# EAGLE board SparkFun-ESP8266-WiFi-Shield-Panel-v10 (EAGLE 7.2.0), part 1 of 3
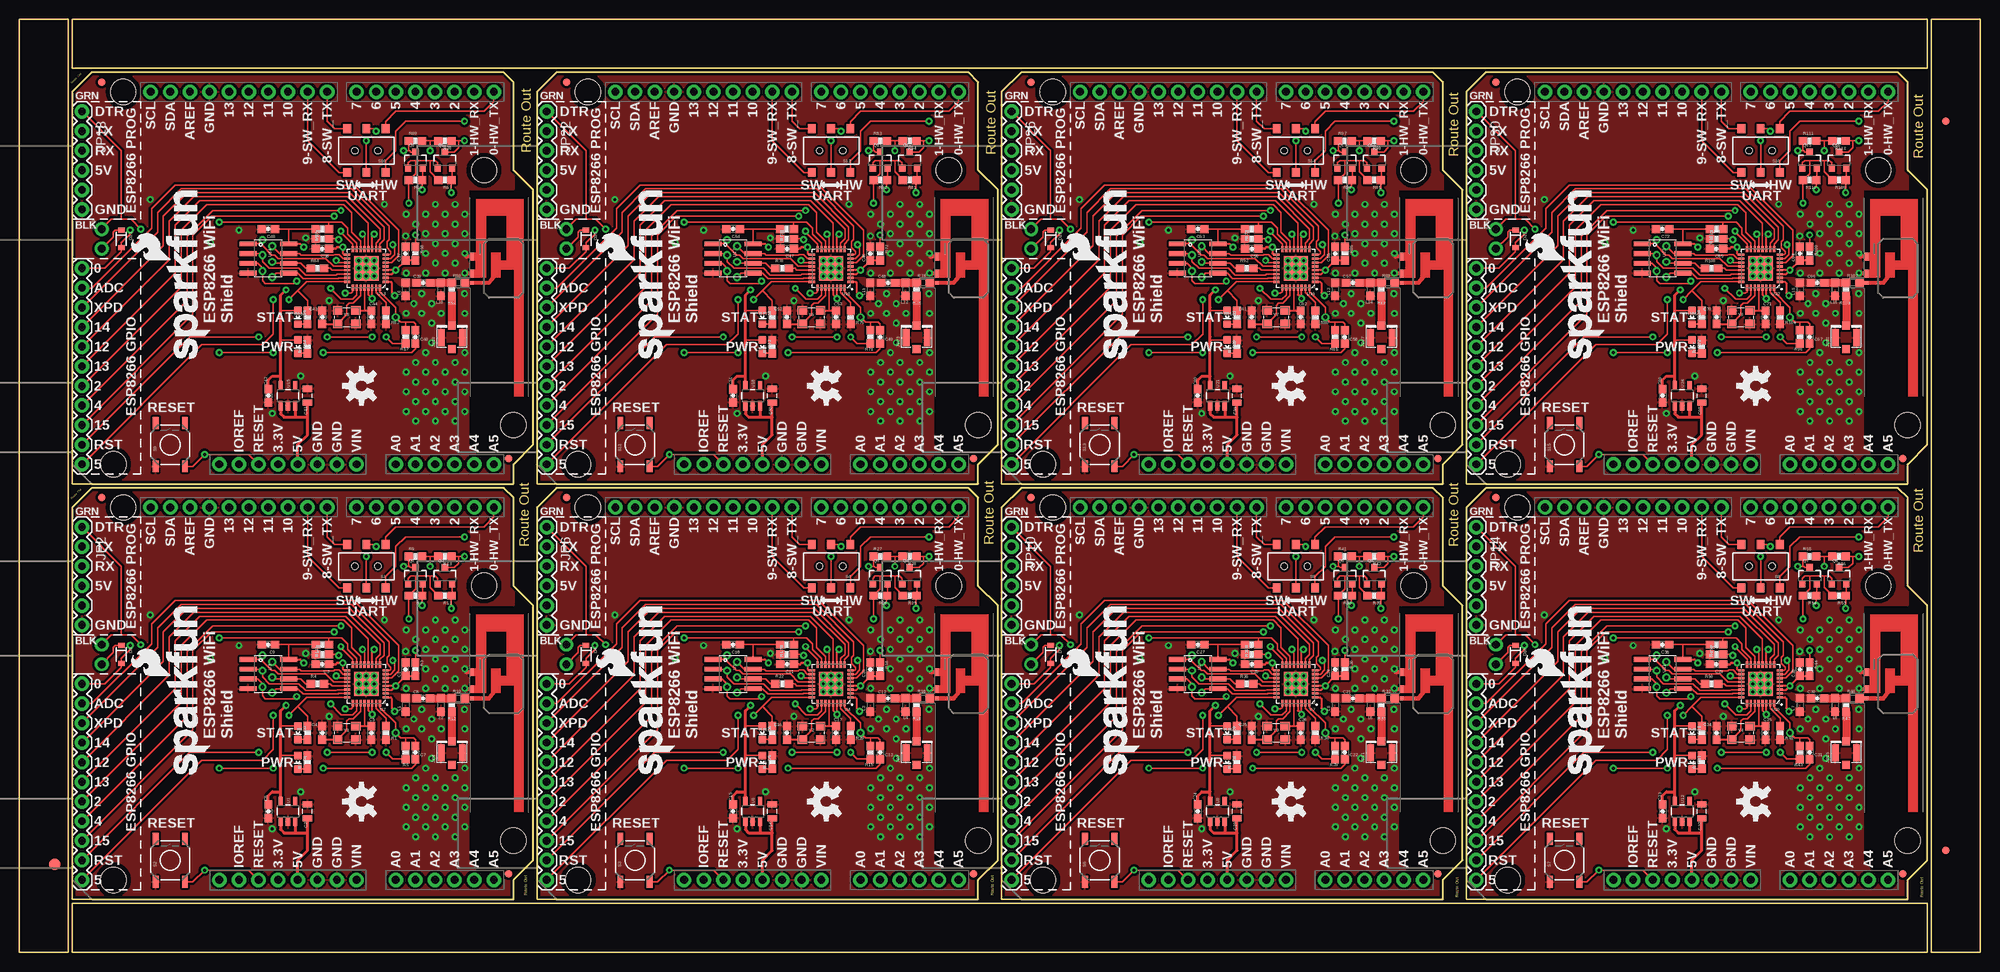
[diagram p0: board, top side]
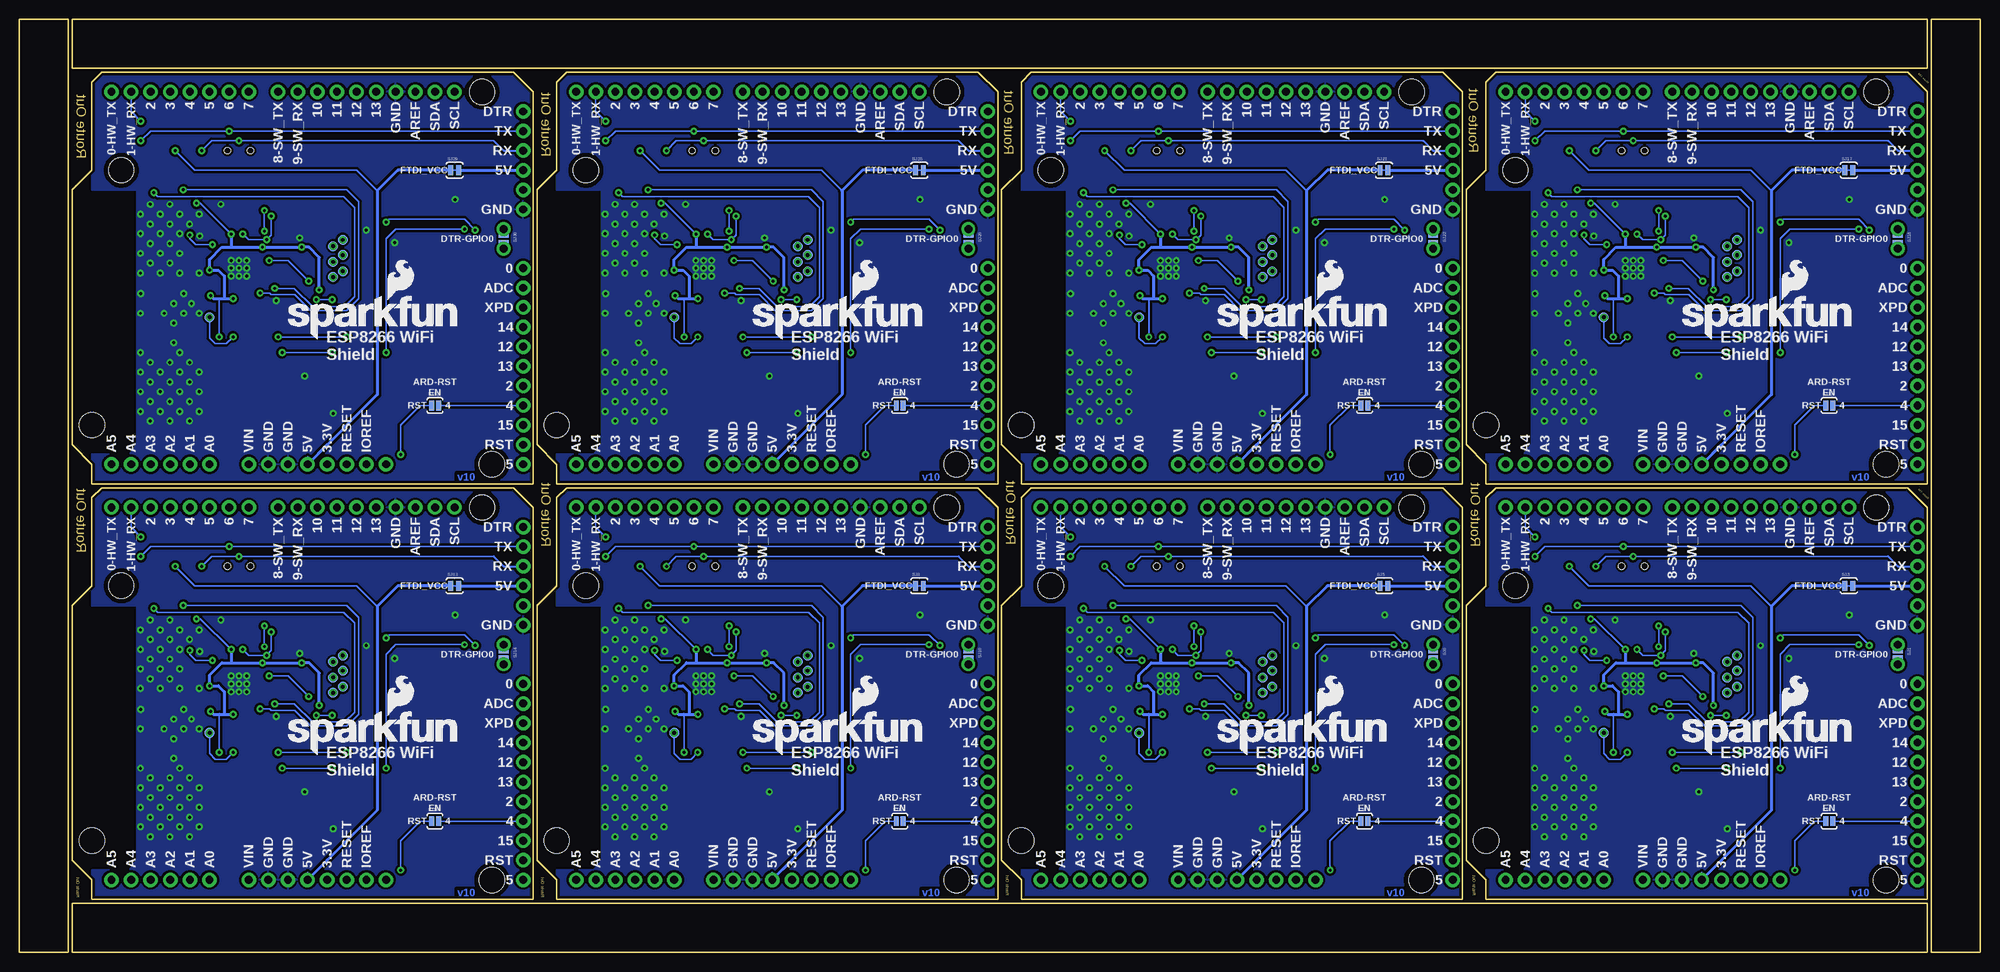
[diagram p1: board, bottom side, seen from below]

Size 254 x 120.9 mm. Coordinates in mm from the lower left corner, seen from the top.
Outline: 6.86,57.66 9.4,60.2 62.74,60.2 64.01,58.93 64.01,47.5 66.55,44.96 66.55,11.94 64.01,9.4 64.01,6.86 6.86,6.86 6.86,57.66
Outline: 67.06,57.66 69.6,60.2 122.94,60.2 124.21,58.93 124.21,47.5 126.75,44.96 126.75,11.94 124.21,9.4 124.21,6.86 67.06,6.86 67.06,57.66
Outline: 127.25,57.66 129.79,60.2 183.13,60.2 184.4,58.93 184.4,47.5 186.94,44.96 186.94,11.94 184.4,9.4 184.4,6.86 127.25,6.86 127.25,57.66
Outline: 187.45,57.66 189.99,60.2 243.33,60.2 244.6,58.93 244.6,47.5 247.14,44.96 247.14,11.94 244.6,9.4 244.6,6.86 187.45,6.86 187.45,57.66
Outline: 6.86,111.51 9.4,114.05 62.74,114.05 64.01,112.78 64.01,101.35 66.55,98.81 66.55,65.79 64.01,63.25 64.01,60.71 6.86,60.71 6.86,111.51
Outline: 67.06,111.51 69.6,114.05 122.94,114.05 124.21,112.78 124.21,101.35 126.75,98.81 126.75,65.79 124.21,63.25 124.21,60.71 67.06,60.71 67.06,111.51
Outline: 127.25,111.51 129.79,114.05 183.13,114.05 184.4,112.78 184.4,101.35 186.94,98.81 186.94,65.79 184.4,63.25 184.4,60.71 127.25,60.71 127.25,111.51
Outline: 187.45,111.51 189.99,114.05 243.33,114.05 244.6,112.78 244.6,101.35 247.14,98.81 247.14,65.79 244.6,63.25 244.6,60.71 187.45,60.71 187.45,111.51
Outline: 6.35,0 6.35,120.9 0,120.9 0,0 6.35,0
Outline: 6.86,6.35 6.86,0 247.14,0 247.14,6.35 6.86,6.35
Outline: 254,0 254,120.9 247.65,120.9 247.65,0 254,0
Outline: 247.14,114.55 247.14,120.9 6.86,120.9 6.86,114.55 247.14,114.55
Copper layers (1*16): Top 0.035mm / dielectric 1.5mm / Bottom 0.035mm
Design rules "SparkFun-2-layer": minimum track width 7mil, minimum drill 15mil, track to track 8mil, track to pad 8mil, pad to pad 8mil, via to via 8mil, smd to smd 8mil, copper to edge 8mil, drill to drill 8mil, minimum pad ring 12mil, minimum via ring 10mil, stop-mask expansion 4mil, vias tented up to drill 20mil, thermal gap 10mil

## Footprints (pad centres in the part's own frame; a part is rotated, then mirrored left to right if it is on the bottom)
0603-CAP = smd 1.1 x 1: 1 -0.85,0; 2 0.85,0
0805 = smd 0.8 x 1.2: 1 -0.9,0; 2 0.9,0
LED-0603 = smd 1 x 1: A 0,-0.877; C 0,0.877
SOD-323 = smd 0.63 x 0.83: A 1.15,0; C -1.15,0
TRACE_ANTENNA_2.4GHZ_25.7MM = smd 0.46 x 0.46: ANT 0,0.23 | smd 1 x 0.46: GND -1.18,0.23; GND2 -3.38,0.23
FIDUCIAL-1.5X3 = smd 1.5 x 1.5: 1 0,0
FIDUCIAL-1X2 = smd 1 x 1: 1 0,0
1X11 = drill 1.016 pad 1.88: 1 0,0; 2 2.54,0; 3 5.08,0; 4 7.62,0; 5 10.16,0; 6 12.7,0; 7 15.24,0; 8 17.78,0; 9 20.32,0; 10 22.86,0; 11 25.4,0
FTDI_BASIC = drill 1.016 pad 1.88: CTS 10.16,0; DTR 0,0; GND 12.7,0; RXI 2.54,0; TXO 5.08,0; VCC 7.62,0
UNO_R3_SHIELD_NOLABELS = drill 1.016 pad 1.88: 3.3V 50.8,26.67; 5V 50.8,29.21; A0 50.8,41.91; A1 50.8,44.45; A2 50.8,46.99; A3 50.8,49.53; A4 50.8,52.07; A5 50.8,54.61; AREF 2.54,15.24; D2 2.54,49.53; D3 2.54,46.99; D4 2.54,44.45; D5 2.54,41.91; D6 2.54,39.37; D7 2.54,36.83; D8 2.54,33.02; D9 2.54,30.48; D10 2.54,27.94; D11 2.54,25.4; D12 2.54,22.86; D13 2.54,20.32; GND@0 50.8,31.75; GND@1 50.8,34.29; GND@2 2.54,17.78; IOREF 50.8,21.59; NC 50.8,19.05; RES 50.8,24.13; RX 2.54,54.61; SCL 2.54,10.16; SDA 2.54,12.7; TX 2.54,52.07; VIN 50.8,36.83
U.FL = smd 2.2 x 0.85: P$1 0,1.375; P$2 0,-1.375 | smd 1.05 x 1: P$3 1.525,0; P$4 -1.525,0
0603 = smd 1.1 x 1: 1 -0.85,0; 2 0.85,0
SOT23-3 = smd 0.8 x 0.9: 1 -0.95,-1; 2 0.95,-1; 3 0,1.1
0603-RES = smd 1.1 x 1: 1 -0.85,0; 2 0.85,0
AYZ0202 = smd 1 x 1.15: 1 -2.5,2.825; 2 0,2.825; 3 2.5,2.825; 4 -2.5,-2.825; 5 0,-2.825; 6 2.5,-2.825 | hole 0.85: 1.5,0; -1.5,0
TACTILE-SWITCH-SMD = smd 1.524 x 0.762: 1 -2.794,1.905; 2 2.794,1.905; 3 -2.794,-1.905; 4 2.794,-1.905
PAD-JUMPER-2-NO_NO_SILK = smd 0.635 x 1.27: 1 -0.45,0; 2 0.45,0
PTH-JUMPER-2-NO_NO_SILK = drill 1.016 pad 1.778: 1 -1.27,0; 2 1.27,0
PAD-JUMPER-2-NC_BY_TRACE_YES_SILK = smd 0.635 x 1.27: 1 -0.508,0; 2 0.508,0
PAD-JUMPER-2-NO_YES_SILK = smd 0.635 x 1.27: 1 -0.45,0; 2 0.45,0
STAND-OFF = hole 3.302: 0,0
PAD.03X.05 = smd 1.27 x 1.27: P$1 0,0
SOT23-5 = smd 0.55 x 1.2: 1 -0.95,-1.3; 2 0,-1.3; 3 0.95,-1.3; 4 0.95,1.3; 5 -0.95,1.3
QFN32 = smd 0.8 x 0.285: 1 -2.5,1.75; 2 -2.5,1.25; 3 -2.5,0.75; 4 -2.5,0.25; 5 -2.5,-0.25; 6 -2.5,-0.75; 7 -2.5,-1.25; 8 -2.5,-1.75; 17 2.5,-1.75; 18 2.5,-1.25; 19 2.5,-0.75; 20 2.5,-0.25; 21 2.5,0.25; 22 2.5,0.75; 23 2.5,1.25; 24 2.5,1.75 | smd 0.285 x 0.8: 9 -1.75,-2.5; 10 -1.25,-2.5; 11 -0.75,-2.5; 12 -0.25,-2.5; 13 0.25,-2.5; 14 0.75,-2.5; 15 1.25,-2.5; 16 1.75,-2.5; 25 1.75,2.5; 26 1.25,2.5; 27 0.75,2.5; 28 0.25,2.5; 29 -0.25,2.5; 30 -0.75,2.5; 31 -1.25,2.5; 32 -1.75,2.5 | smd 3.15 x 3.15: EP 0,0
SO08 = smd 0.61 x 2.21: 1 -1.905,-2.616; 2 -0.635,-2.616; 3 0.635,-2.616; 4 1.905,-2.616; 5 1.905,2.616; 6 0.635,2.616; 7 -0.635,2.616; 8 -1.905,2.616
CRYSTAL-SMD-3.2X2.5 = smd 1.2 x 1.1: 1 -1.175,-0.875; 2 1.175,-0.875; 3 1.175,0.875; 4 -1.175,0.875

## Placement (x,y rotation side)
C1  10uF  [0603-CAP]  50.04,36.7 90 top
C2  1.0uF  [0805]  37.34,18.29 90 top
C3  0.1uF  [0603-CAP]  39.24,37.34 180 top
C4  10pF  [0603-CAP]  39.24,28.45 270 top
C5  10pF  [0603-CAP]  45.59,28.45 90 top
C6  2.2uF  [0603-CAP]  32.26,18.29 270 top
C7  1.0uF  [0603-CAP]  51.31,25.91 270 top
C8  5.6pF  [0603-CAP]  52.32,32.92 0 top
C9  0.1uF  [0603-CAP]  32.26,39.88 180 top
C10  10uF  [0603-CAP]  110.24,36.7 90 top
C11  0.1uF  [0603-CAP]  99.44,37.34 180 top
C12  5.6pF  [0603-CAP]  112.52,32.92 0 top
C13  1.0uF  [0603-CAP]  111.51,25.91 270 top
C14  1.0uF  [0805]  97.54,18.29 90 top
C15  2.2uF  [0603-CAP]  92.46,18.29 270 top
C16  10pF  [0603-CAP]  99.44,28.45 270 top
C17  10pF  [0603-CAP]  105.79,28.45 90 top
C18  0.1uF  [0603-CAP]  92.46,39.88 180 top
C19  10uF  [0603-CAP]  170.43,36.7 90 top
C20  0.1uF  [0603-CAP]  159.64,37.34 180 top
C21  5.6pF  [0603-CAP]  172.72,32.92 0 top
C22  1.0uF  [0603-CAP]  171.7,25.91 270 top
C23  1.0uF  [0805]  157.73,18.29 90 top
C24  2.2uF  [0603-CAP]  152.65,18.29 270 top
C25  10pF  [0603-CAP]  159.64,28.45 270 top
C26  10pF  [0603-CAP]  165.99,28.45 90 top
C27  0.1uF  [0603-CAP]  152.65,39.88 180 top
C28  10uF  [0603-CAP]  230.63,36.7 90 top
C29  0.1uF  [0603-CAP]  219.84,37.34 180 top
C30  5.6pF  [0603-CAP]  232.92,32.92 0 top
C31  1.0uF  [0603-CAP]  231.9,25.91 270 top
C32  1.0uF  [0805]  217.93,18.29 90 top
C33  2.2uF  [0603-CAP]  212.85,18.29 270 top
C34  10pF  [0603-CAP]  219.84,28.45 270 top
C35  10pF  [0603-CAP]  226.19,28.45 90 top
C36  0.1uF  [0603-CAP]  212.85,39.88 180 top
C37  10uF  [0603-CAP]  50.04,90.55 90 top
C38  0.1uF  [0603-CAP]  39.24,91.19 180 top
C39  5.6pF  [0603-CAP]  52.32,86.77 0 top
C40  1.0uF  [0603-CAP]  51.31,79.76 270 top
C41  1.0uF  [0805]  37.34,72.14 90 top
C42  2.2uF  [0603-CAP]  32.26,72.14 270 top
C43  10pF  [0603-CAP]  39.24,82.3 270 top
C44  10pF  [0603-CAP]  45.59,82.3 90 top
C45  0.1uF  [0603-CAP]  32.26,93.73 180 top
C46  10uF  [0603-CAP]  110.24,90.55 90 top
C47  0.1uF  [0603-CAP]  99.44,91.19 180 top
C48  5.6pF  [0603-CAP]  112.52,86.77 0 top
C49  1.0uF  [0603-CAP]  111.51,79.76 270 top
C50  1.0uF  [0805]  97.54,72.14 90 top
C51  2.2uF  [0603-CAP]  92.46,72.14 270 top
C52  10pF  [0603-CAP]  99.44,82.3 270 top
C53  10pF  [0603-CAP]  105.79,82.3 90 top
C54  0.1uF  [0603-CAP]  92.46,93.73 180 top
C55  10uF  [0603-CAP]  170.43,90.55 90 top
C56  0.1uF  [0603-CAP]  159.64,91.19 180 top
C57  5.6pF  [0603-CAP]  172.72,86.77 0 top
C58  1.0uF  [0603-CAP]  171.7,79.76 270 top
C59  1.0uF  [0805]  157.73,72.14 90 top
C60  2.2uF  [0603-CAP]  152.65,72.14 270 top
C61  10pF  [0603-CAP]  159.64,82.3 270 top
C62  10pF  [0603-CAP]  165.99,82.3 90 top
C63  0.1uF  [0603-CAP]  152.65,93.73 180 top
C64  10uF  [0603-CAP]  230.63,90.55 90 top
C65  0.1uF  [0603-CAP]  219.84,91.19 180 top
C66  5.6pF  [0603-CAP]  232.92,86.77 0 top
C67  1.0uF  [0603-CAP]  231.9,79.76 270 top
C68  1.0uF  [0805]  217.93,72.14 90 top
C69  2.2uF  [0603-CAP]  212.85,72.14 270 top
C70  10pF  [0603-CAP]  219.84,82.3 270 top
C71  10pF  [0603-CAP]  226.19,82.3 90 top
C72  0.1uF  [0603-CAP]  212.85,93.73 180 top
D1  RED  [LED-0603]  36.07,24.64 180 top
D2  BLUE  [LED-0603]  36.07,28.45 180 top
D3  BAS16  [SOD-323]  13.21,38.61 270 top
D4  BAS16  [SOD-323]  73.41,38.61 270 top
D5  RED  [LED-0603]  96.27,24.64 180 top
D6  BLUE  [LED-0603]  96.27,28.45 180 top
D7  BAS16  [SOD-323]  133.6,38.61 270 top
D8  RED  [LED-0603]  156.46,24.64 180 top
D9  BLUE  [LED-0603]  156.46,28.45 180 top
D10  BAS16  [SOD-323]  193.8,38.61 270 top
D11  RED  [LED-0603]  216.66,24.64 180 top
D12  BLUE  [LED-0603]  216.66,28.45 180 top
D13  BAS16  [SOD-323]  13.21,92.46 270 top
D14  RED  [LED-0603]  36.07,78.49 180 top
D15  BLUE  [LED-0603]  36.07,82.3 180 top
D16  BAS16  [SOD-323]  73.41,92.46 270 top
D17  RED  [LED-0603]  96.27,78.49 180 top
D18  BLUE  [LED-0603]  96.27,82.3 180 top
D19  BAS16  [SOD-323]  133.6,92.46 270 top
D20  RED  [LED-0603]  156.46,78.49 180 top
D21  BLUE  [LED-0603]  156.46,82.3 180 top
D22  BAS16  [SOD-323]  193.8,92.46 270 top
D23  RED  [LED-0603]  216.66,78.49 180 top
D24  BLUE  [LED-0603]  216.66,82.3 180 top
E1  ANTENNATRACE  [TRACE_ANTENNA_2.4GHZ_25.7MM]  58.42,32.92 270 top
E2  ANTENNATRACE  [TRACE_ANTENNA_2.4GHZ_25.7MM]  118.62,32.92 270 top
E3  ANTENNATRACE  [TRACE_ANTENNA_2.4GHZ_25.7MM]  178.82,32.92 270 top
E4  ANTENNATRACE  [TRACE_ANTENNA_2.4GHZ_25.7MM]  239.01,32.92 270 top
E5  ANTENNATRACE  [TRACE_ANTENNA_2.4GHZ_25.7MM]  58.42,86.77 270 top
E6  ANTENNATRACE  [TRACE_ANTENNA_2.4GHZ_25.7MM]  118.62,86.77 270 top
E7  ANTENNATRACE  [TRACE_ANTENNA_2.4GHZ_25.7MM]  178.82,86.77 270 top
E8  ANTENNATRACE  [TRACE_ANTENNA_2.4GHZ_25.7MM]  239.01,86.77 270 top
E$1  [FIDUCIAL-1.5X3]  4.57,11.43 0 top
E$4  [FIDUCIAL-1X2]  249.56,13.21 0 top
E$5  [FIDUCIAL-1X2]  249.56,107.7 180 top
FID1  FIDUCIAL1X2  [FIDUCIAL-1X2]  63.37,10.16 0 top
FID2  FIDUCIAL1X2  [FIDUCIAL-1X2]  10.67,58.93 0 top
FID3  FIDUCIAL1X2  [FIDUCIAL-1X2]  70.87,58.93 0 top
FID4  FIDUCIAL1X2  [FIDUCIAL-1X2]  123.57,10.16 0 top
FID5  FIDUCIAL1X2  [FIDUCIAL-1X2]  131.06,58.93 0 top
FID6  FIDUCIAL1X2  [FIDUCIAL-1X2]  183.77,10.16 0 top
FID7  FIDUCIAL1X2  [FIDUCIAL-1X2]  191.26,58.93 0 top
FID8  FIDUCIAL1X2  [FIDUCIAL-1X2]  243.97,10.16 0 top
FID9  FIDUCIAL1X2  [FIDUCIAL-1X2]  10.67,112.78 0 top
FID10  FIDUCIAL1X2  [FIDUCIAL-1X2]  63.37,64.01 0 top
FID11  FIDUCIAL1X2  [FIDUCIAL-1X2]  70.87,112.78 0 top
FID12  FIDUCIAL1X2  [FIDUCIAL-1X2]  123.57,64.01 0 top
FID13  FIDUCIAL1X2  [FIDUCIAL-1X2]  131.06,112.78 0 top
FID14  FIDUCIAL1X2  [FIDUCIAL-1X2]  183.77,64.01 0 top
FID15  FIDUCIAL1X2  [FIDUCIAL-1X2]  191.26,112.78 0 top
FID16  FIDUCIAL1X2  [FIDUCIAL-1X2]  243.97,64.01 0 top
JP1  [1X11]  8.13,9.4 90 top
JP2  FTDI_BASICPTH  [FTDI_BASIC]  8.13,55.12 270 top
JP3  ARDUINO_R3_SHIELDNOLABELS  [UNO_R3_SHIELD_NOLABELS]  6.86,60.2 270 top
JP4  U.FL  [U.FL]  56.03,25.84 90 top
JP5  ARDUINO_R3_SHIELDNOLABELS  [UNO_R3_SHIELD_NOLABELS]  67.06,60.2 270 top
JP6  FTDI_BASICPTH  [FTDI_BASIC]  68.33,55.12 270 top
JP7  U.FL  [U.FL]  116.23,25.84 90 top
JP8  [1X11]  68.33,9.4 90 top
JP9  ARDUINO_R3_SHIELDNOLABELS  [UNO_R3_SHIELD_NOLABELS]  127.25,60.2 270 top
JP10  FTDI_BASICPTH  [FTDI_BASIC]  128.52,55.12 270 top
JP11  U.FL  [U.FL]  176.43,25.84 90 top
JP12  [1X11]  128.52,9.4 90 top
JP13  ARDUINO_R3_SHIELDNOLABELS  [UNO_R3_SHIELD_NOLABELS]  187.45,60.2 270 top
JP14  FTDI_BASICPTH  [FTDI_BASIC]  188.72,55.12 270 top
JP15  U.FL  [U.FL]  236.63,25.84 90 top
JP16  [1X11]  188.72,9.4 90 top
JP17  ARDUINO_R3_SHIELDNOLABELS  [UNO_R3_SHIELD_NOLABELS]  6.86,114.05 270 top
JP18  FTDI_BASICPTH  [FTDI_BASIC]  8.13,108.97 270 top
JP19  U.FL  [U.FL]  56.03,79.69 90 top
JP20  [1X11]  8.13,63.25 90 top
JP21  ARDUINO_R3_SHIELDNOLABELS  [UNO_R3_SHIELD_NOLABELS]  67.06,114.05 270 top
JP22  FTDI_BASICPTH  [FTDI_BASIC]  68.33,108.97 270 top
JP23  U.FL  [U.FL]  116.23,79.69 90 top
JP24  [1X11]  68.33,63.25 90 top
JP25  ARDUINO_R3_SHIELDNOLABELS  [UNO_R3_SHIELD_NOLABELS]  127.25,114.05 270 top
JP26  FTDI_BASICPTH  [FTDI_BASIC]  128.52,108.97 270 top
JP27  U.FL  [U.FL]  176.43,79.69 90 top
JP28  [1X11]  128.52,63.25 90 top
JP29  ARDUINO_R3_SHIELDNOLABELS  [UNO_R3_SHIELD_NOLABELS]  187.45,114.05 270 top
JP30  FTDI_BASICPTH  [FTDI_BASIC]  188.72,108.97 270 top
JP31  U.FL  [U.FL]  236.63,79.69 90 top
JP32  [1X11]  188.72,63.25 90 top
L1  DNP  [0603]  50.04,32.07 270 top
L2  DNP  [0603]  54.61,32.07 270 top
L3  DNP  [0603]  110.24,32.07 270 top
L4  DNP  [0603]  114.81,32.07 270 top
L5  DNP  [0603]  170.43,32.07 270 top
L6  DNP  [0603]  175.01,32.07 270 top
L7  DNP  [0603]  230.63,32.07 270 top
L8  DNP  [0603]  235.2,32.07 270 top
L9  DNP  [0603]  50.04,85.92 270 top
L10  DNP  [0603]  54.61,85.92 270 top
L11  DNP  [0603]  110.24,85.92 270 top
L12  DNP  [0603]  114.81,85.92 270 top
L13  DNP  [0603]  170.43,85.92 270 top
L14  DNP  [0603]  175.01,85.92 270 top
L15  DNP  [0603]  230.63,85.92 270 top
L16  DNP  [0603]  235.2,85.92 270 top
LOGO1  SFE_LOGO_NAME_FLAME.2_INCH  [SFE_LOGO_NAME_FLAME_.2]  24.77,22.35 90 top
LOGO2  OSHW-LOGOM  [OSHW-LOGO-M]  44.32,19.56 90 top
LOGO3  SFE_LOGO_NAME_FLAME.2_INCH  [SFE_LOGO_NAME_FLAME_.2]  39.24,25.53 0 bottom
LOGO4  OSHW-LOGOM  [OSHW-LOGO-M]  104.52,19.56 90 top
LOGO5  SFE_LOGO_NAME_FLAME.2_INCH  [SFE_LOGO_NAME_FLAME_.2]  84.96,22.35 90 top
LOGO6  SFE_LOGO_NAME_FLAME.2_INCH  [SFE_LOGO_NAME_FLAME_.2]  99.44,25.53 0 bottom
LOGO7  OSHW-LOGOM  [OSHW-LOGO-M]  164.72,19.56 90 top
LOGO8  SFE_LOGO_NAME_FLAME.2_INCH  [SFE_LOGO_NAME_FLAME_.2]  145.16,22.35 90 top
LOGO9  SFE_LOGO_NAME_FLAME.2_INCH  [SFE_LOGO_NAME_FLAME_.2]  159.64,25.53 0 bottom
LOGO10  OSHW-LOGOM  [OSHW-LOGO-M]  224.92,19.56 90 top
LOGO11  SFE_LOGO_NAME_FLAME.2_INCH  [SFE_LOGO_NAME_FLAME_.2]  205.36,22.35 90 top
LOGO12  SFE_LOGO_NAME_FLAME.2_INCH  [SFE_LOGO_NAME_FLAME_.2]  219.84,25.53 0 bottom
LOGO13  OSHW-LOGOM  [OSHW-LOGO-M]  44.32,73.41 90 top
LOGO14  SFE_LOGO_NAME_FLAME.2_INCH  [SFE_LOGO_NAME_FLAME_.2]  24.77,76.2 90 top
LOGO15  SFE_LOGO_NAME_FLAME.2_INCH  [SFE_LOGO_NAME_FLAME_.2]  39.24,79.38 0 bottom
LOGO16  OSHW-LOGOM  [OSHW-LOGO-M]  104.52,73.41 90 top
LOGO17  SFE_LOGO_NAME_FLAME.2_INCH  [SFE_LOGO_NAME_FLAME_.2]  84.96,76.2 90 top
LOGO18  SFE_LOGO_NAME_FLAME.2_INCH  [SFE_LOGO_NAME_FLAME_.2]  99.44,79.38 0 bottom
LOGO19  OSHW-LOGOM  [OSHW-LOGO-M]  164.72,73.41 90 top
LOGO20  SFE_LOGO_NAME_FLAME.2_INCH  [SFE_LOGO_NAME_FLAME_.2]  145.16,76.2 90 top
LOGO21  SFE_LOGO_NAME_FLAME.2_INCH  [SFE_LOGO_NAME_FLAME_.2]  159.64,79.38 0 bottom
LOGO22  OSHW-LOGOM  [OSHW-LOGO-M]  224.92,73.41 90 top
LOGO23  SFE_LOGO_NAME_FLAME.2_INCH  [SFE_LOGO_NAME_FLAME_.2]  205.36,76.2 90 top
LOGO24  SFE_LOGO_NAME_FLAME.2_INCH  [SFE_LOGO_NAME_FLAME_.2]  219.84,79.38 0 bottom
Q1  BSS138  [SOT23-3]  51.31,48.77 0 top
Q2  BSS138  [SOT23-3]  55.12,48.77 0 top
Q3  BSS138  [SOT23-3]  111.51,48.77 0 top
Q4  BSS138  [SOT23-3]  115.32,48.77 0 top
Q5  BSS138  [SOT23-3]  171.7,48.77 0 top
Q6  BSS138  [SOT23-3]  175.51,48.77 0 top
Q7  BSS138  [SOT23-3]  231.9,48.77 0 top
Q8  BSS138  [SOT23-3]  235.71,48.77 0 top
Q9  BSS138  [SOT23-3]  51.31,102.62 0 top
Q10  BSS138  [SOT23-3]  55.12,102.62 0 top
Q11  BSS138  [SOT23-3]  111.51,102.62 0 top
Q12  BSS138  [SOT23-3]  115.32,102.62 0 top
Q13  BSS138  [SOT23-3]  171.7,102.62 0 top
Q14  BSS138  [SOT23-3]  175.51,102.62 0 top
Q15  BSS138  [SOT23-3]  231.9,102.62 0 top
Q16  BSS138  [SOT23-3]  235.71,102.62 0 top
R1  12k  [0603-RES]  47.5,28.45 90 top
R2  200  [0603-RES]  37.34,24.64 90 top
R3  10K  [0603-RES]  51.31,36.7 270 top
R4  200  [0603-RES]  38.61,34.8 0 top
R5  10K  [0603-RES]  50.04,25.91 270 top
R6  200  [0603-RES]  37.34,28.45 270 top
R7  10K  [0603-RES]  51.31,46.23 180 top
R8  10K  [0603-RES]  39.24,38.61 0 top
R9  10K  [0603-RES]  51.31,51.31 0 top
R10  0  [0603]  56.9,32.92 180 top
R11  DNP  [0603-RES]  56.03,32.07 90 top
R12  10K  [0603-RES]  55.12,46.23 180 top
R13  10K  [0603-RES]  55.12,51.31 180 top
R14  1K  [0603-RES]  39.24,39.88 180 top
R15  10K  [0603-RES]  110.24,25.91 270 top
R16  10K  [0603-RES]  111.51,36.7 270 top
R17  1K  [0603-RES]  99.44,39.88 180 top
R18  0  [0603]  117.09,32.92 180 top
R19  DNP  [0603-RES]  116.23,32.07 90 top
R20  12k  [0603-RES]  107.7,28.45 90 top
R21  200  [0603-RES]  97.54,28.45 270 top
R22  200  [0603-RES]  98.81,34.8 0 top
R23  200  [0603-RES]  97.54,24.64 90 top
R24  10K  [0603-RES]  99.44,38.61 0 top
R25  10K  [0603-RES]  115.32,46.23 180 top
R26  10K  [0603-RES]  111.51,46.23 180 top
R27  10K  [0603-RES]  111.51,51.31 0 top
R28  10K  [0603-RES]  115.32,51.31 180 top
R29  10K  [0603-RES]  170.43,25.91 270 top
R30  10K  [0603-RES]  171.7,36.7 270 top
R31  1K  [0603-RES]  159.64,39.88 180 top
R32  0  [0603]  177.29,32.92 180 top
R33  DNP  [0603-RES]  176.43,32.07 90 top
R34  12k  [0603-RES]  167.89,28.45 90 top
R35  200  [0603-RES]  157.73,28.45 270 top
R36  200  [0603-RES]  159,34.8 0 top
R37  200  [0603-RES]  157.73,24.64 90 top
R38  10K  [0603-RES]  159.64,38.61 0 top
R39  10K  [0603-RES]  175.51,46.23 180 top
R40  10K  [0603-RES]  171.7,46.23 180 top
R41  10K  [0603-RES]  171.7,51.31 0 top
R42  10K  [0603-RES]  175.51,51.31 180 top
R43  10K  [0603-RES]  230.63,25.91 270 top
R44  10K  [0603-RES]  231.9,36.7 270 top
R45  1K  [0603-RES]  219.84,39.88 180 top
R46  0  [0603]  237.49,32.92 180 top
R47  DNP  [0603-RES]  236.63,32.07 90 top
R48  12k  [0603-RES]  228.09,28.45 90 top
R49  200  [0603-RES]  217.93,28.45 270 top
R50  200  [0603-RES]  219.2,34.8 0 top
R51  200  [0603-RES]  217.93,24.64 90 top
R52  10K  [0603-RES]  219.84,38.61 0 top
R53  10K  [0603-RES]  235.71,46.23 180 top
R54  10K  [0603-RES]  231.9,46.23 180 top
R55  10K  [0603-RES]  231.9,51.31 0 top
R56  10K  [0603-RES]  235.71,51.31 180 top
R57  10K  [0603-RES]  50.04,79.76 270 top
R58  10K  [0603-RES]  51.31,90.55 270 top
R59  1K  [0603-RES]  39.24,93.73 180 top
R60  0  [0603]  56.9,86.77 180 top
R61  DNP  [0603-RES]  56.03,85.92 90 top
R62  12k  [0603-RES]  47.5,82.3 90 top
R63  200  [0603-RES]  37.34,82.3 270 top
R64  200  [0603-RES]  38.61,88.65 0 top
R65  200  [0603-RES]  37.34,78.49 90 top
R66  10K  [0603-RES]  39.24,92.46 0 top
R67  10K  [0603-RES]  55.12,100.08 180 top
R68  10K  [0603-RES]  51.31,100.08 180 top
R69  10K  [0603-RES]  51.31,105.16 0 top
R70  10K  [0603-RES]  55.12,105.16 180 top
R71  10K  [0603-RES]  110.24,79.76 270 top
R72  10K  [0603-RES]  111.51,90.55 270 top
R73  1K  [0603-RES]  99.44,93.73 180 top
R74  0  [0603]  117.09,86.77 180 top
R75  DNP  [0603-RES]  116.23,85.92 90 top
R76  12k  [0603-RES]  107.7,82.3 90 top
R77  200  [0603-RES]  97.54,82.3 270 top
R78  200  [0603-RES]  98.81,88.65 0 top
R79  200  [0603-RES]  97.54,78.49 90 top
R80  10K  [0603-RES]  99.44,92.46 0 top
R81  10K  [0603-RES]  115.32,100.08 180 top
R82  10K  [0603-RES]  111.51,100.08 180 top
R83  10K  [0603-RES]  111.51,105.16 0 top
R84  10K  [0603-RES]  115.32,105.16 180 top
R85  10K  [0603-RES]  170.43,79.76 270 top
R86  10K  [0603-RES]  171.7,90.55 270 top
R87  1K  [0603-RES]  159.64,93.73 180 top
R88  0  [0603]  177.29,86.77 180 top
R89  DNP  [0603-RES]  176.43,85.92 90 top
R90  12k  [0603-RES]  167.89,82.3 90 top
R91  200  [0603-RES]  157.73,82.3 270 top
R92  200  [0603-RES]  159,88.65 0 top
R93  200  [0603-RES]  157.73,78.49 90 top
R94  10K  [0603-RES]  159.64,92.46 0 top
R95  10K  [0603-RES]  175.51,100.08 180 top
R96  10K  [0603-RES]  171.7,100.08 180 top
R97  10K  [0603-RES]  171.7,105.16 0 top
R98  10K  [0603-RES]  175.51,105.16 180 top
R99  10K  [0603-RES]  230.63,79.76 270 top
R100  10K  [0603-RES]  231.9,90.55 270 top
R101  1K  [0603-RES]  219.84,93.73 180 top
R102  0  [0603]  237.49,86.77 180 top
R103  DNP  [0603-RES]  236.63,85.92 90 top
R104  12k  [0603-RES]  228.09,82.3 90 top
R105  200  [0603-RES]  217.93,82.3 270 top
R106  200  [0603-RES]  219.2,88.65 0 top
R107  200  [0603-RES]  217.93,78.49 90 top
R108  10K  [0603-RES]  219.84,92.46 0 top
R109  10K  [0603-RES]  235.71,100.08 180 top
R110  10K  [0603-RES]  231.9,100.08 180 top
R111  10K  [0603-RES]  231.9,105.16 0 top
R112  10K  [0603-RES]  235.71,105.16 180 top
S1  DPDT  [AYZ0202]  44.96,50.04 180 top
S2  Reset  [TACTILE-SWITCH-SMD]  19.56,11.94 90 top
S3  Reset  [TACTILE-SWITCH-SMD]  79.76,11.94 90 top
S4  DPDT  [AYZ0202]  105.16,50.04 180 top
S5  Reset  [TACTILE-SWITCH-SMD]  139.95,11.94 90 top
S6  DPDT  [AYZ0202]  165.35,50.04 180 top
S7  Reset  [TACTILE-SWITCH-SMD]  200.15,11.94 90 top
S8  DPDT  [AYZ0202]  225.55,50.04 180 top
S9  Reset  [TACTILE-SWITCH-SMD]  19.56,65.79 90 top
S10  DPDT  [AYZ0202]  44.96,103.89 180 top
S11  Reset  [TACTILE-SWITCH-SMD]  79.76,65.79 90 top
S12  DPDT  [AYZ0202]  105.16,103.89 180 top
S13  Reset  [TACTILE-SWITCH-SMD]  139.95,65.79 90 top
S14  DPDT  [AYZ0202]  165.35,103.89 180 top
S15  Reset  [TACTILE-SWITCH-SMD]  200.15,65.79 90 top
S16  DPDT  [AYZ0202]  225.55,103.89 180 top
SJ1  [PAD-JUMPER-2-NO_NO_SILK]  10.67,38.61 270 bottom
SJ2  [PTH-JUMPER-2-NO_NO_SILK]  10.67,38.61 270 top
SJ3  [PAD-JUMPER-2-NC_BY_TRACE_YES_SILK]  17.02,47.5 0 bottom
SJ4  [PAD-JUMPER-2-NO_YES_SILK]  19.56,17.02 0 bottom
SJ5  [PAD-JUMPER-2-NC_BY_TRACE_YES_SILK]  77.22,47.5 0 bottom
SJ6  [PAD-JUMPER-2-NO_NO_SILK]  70.87,38.61 270 bottom
SJ7  [PTH-JUMPER-2-NO_NO_SILK]  70.87,38.61 270 top
SJ8  [PAD-JUMPER-2-NO_YES_SILK]  79.76,17.02 0 bottom
SJ9  [PAD-JUMPER-2-NC_BY_TRACE_YES_SILK]  137.41,47.5 0 bottom
SJ10  [PAD-JUMPER-2-NO_NO_SILK]  131.06,38.61 270 bottom
SJ11  [PTH-JUMPER-2-NO_NO_SILK]  131.06,38.61 270 top
SJ12  [PAD-JUMPER-2-NO_YES_SILK]  139.95,17.02 0 bottom
SJ13  [PAD-JUMPER-2-NC_BY_TRACE_YES_SILK]  197.61,47.5 0 bottom
SJ14  [PAD-JUMPER-2-NO_NO_SILK]  191.26,38.61 270 bottom
SJ15  [PTH-JUMPER-2-NO_NO_SILK]  191.26,38.61 270 top
SJ16  [PAD-JUMPER-2-NO_YES_SILK]  200.15,17.02 0 bottom
SJ17  [PAD-JUMPER-2-NC_BY_TRACE_YES_SILK]  17.02,101.35 0 bottom
SJ18  [PAD-JUMPER-2-NO_NO_SILK]  10.67,92.46 270 bottom
SJ19  [PTH-JUMPER-2-NO_NO_SILK]  10.67,92.46 270 top
SJ20  [PAD-JUMPER-2-NO_YES_SILK]  19.56,70.87 0 bottom
SJ21  [PAD-JUMPER-2-NC_BY_TRACE_YES_SILK]  77.22,101.35 0 bottom
SJ22  [PAD-JUMPER-2-NO_NO_SILK]  70.87,92.46 270 bottom
SJ23  [PTH-JUMPER-2-NO_NO_SILK]  70.87,92.46 270 top
SJ24  [PAD-JUMPER-2-NO_YES_SILK]  79.76,70.87 0 bottom
SJ25  [PAD-JUMPER-2-NC_BY_TRACE_YES_SILK]  137.41,101.35 0 bottom
SJ26  [PAD-JUMPER-2-NO_NO_SILK]  131.06,92.46 270 bottom
SJ27  [PTH-JUMPER-2-NO_NO_SILK]  131.06,92.46 270 top
SJ28  [PAD-JUMPER-2-NO_YES_SILK]  139.95,70.87 0 bottom
SJ29  [PAD-JUMPER-2-NC_BY_TRACE_YES_SILK]  197.61,101.35 0 bottom
SJ30  [PAD-JUMPER-2-NO_NO_SILK]  191.26,92.46 270 bottom
SJ31  [PTH-JUMPER-2-NO_NO_SILK]  191.26,92.46 270 top
SJ32  [PAD-JUMPER-2-NO_YES_SILK]  200.15,70.87 0 bottom
STANDOFF1  STAND-OFF  [STAND-OFF]  60.2,47.5 0 top
STANDOFF2  STAND-OFF  [STAND-OFF]  13.46,57.66 0 top
STANDOFF3  STAND-OFF  [STAND-OFF]  64.01,14.48 0 top
STANDOFF4  STAND-OFF  [STAND-OFF]  12.19,9.4 0 top
STANDOFF5  STAND-OFF  [STAND-OFF]  124.21,14.48 0 top
STANDOFF6  STAND-OFF  [STAND-OFF]  73.66,57.66 0 top
STANDOFF7  STAND-OFF  [STAND-OFF]  72.39,9.4 0 top
STANDOFF8  STAND-OFF  [STAND-OFF]  120.4,47.5 0 top
STANDOFF9  STAND-OFF  [STAND-OFF]  184.4,14.48 0 top
STANDOFF10  STAND-OFF  [STAND-OFF]  133.86,57.66 0 top
STANDOFF11  STAND-OFF  [STAND-OFF]  132.59,9.4 0 top
STANDOFF12  STAND-OFF  [STAND-OFF]  180.59,47.5 0 top
STANDOFF13  STAND-OFF  [STAND-OFF]  244.6,14.48 0 top
STANDOFF14  STAND-OFF  [STAND-OFF]  194.06,57.66 0 top
STANDOFF15  STAND-OFF  [STAND-OFF]  192.79,9.4 0 top
STANDOFF16  STAND-OFF  [STAND-OFF]  240.79,47.5 0 top
STANDOFF17  STAND-OFF  [STAND-OFF]  64.01,68.33 0 top
STANDOFF18  STAND-OFF  [STAND-OFF]  13.46,111.51 0 top
STANDOFF19  STAND-OFF  [STAND-OFF]  12.19,63.25 0 top
STANDOFF20  STAND-OFF  [STAND-OFF]  60.2,101.35 0 top
STANDOFF21  STAND-OFF  [STAND-OFF]  124.21,68.33 0 top
STANDOFF22  STAND-OFF  [STAND-OFF]  73.66,111.51 0 top
STANDOFF23  STAND-OFF  [STAND-OFF]  72.39,63.25 0 top
STANDOFF24  STAND-OFF  [STAND-OFF]  120.4,101.35 0 top
STANDOFF25  STAND-OFF  [STAND-OFF]  184.4,68.33 0 top
STANDOFF26  STAND-OFF  [STAND-OFF]  133.86,111.51 0 top
STANDOFF27  STAND-OFF  [STAND-OFF]  132.59,63.25 0 top
STANDOFF28  STAND-OFF  [STAND-OFF]  180.59,101.35 0 top
STANDOFF29  STAND-OFF  [STAND-OFF]  244.6,68.33 0 top
STANDOFF30  STAND-OFF  [STAND-OFF]  194.06,111.51 0 top
STANDOFF31  STAND-OFF  [STAND-OFF]  192.79,63.25 0 top
STANDOFF32  STAND-OFF  [STAND-OFF]  240.79,101.35 0 top
TP1  [PAD.03X.05]  31.5,34.42 0 bottom
TP2  [PAD.03X.05]  32.77,33.66 0 bottom
TP3  [PAD.03X.05]  32.77,35.62 0 bottom
TP4  [PAD.03X.05]  32.77,37.66 0 bottom
TP5  [PAD.03X.05]  31.5,36.51 0 bottom
TP6  [PAD.03X.05]  31.5,38.48 0 bottom
TP7  [PAD.03X.05]  48.77,28.45 0 bottom
TP8  [PAD.03X.05]  108.97,28.45 0 bottom
TP9  [PAD.03X.05]  91.69,38.48 0 bottom
TP10  [PAD.03X.05]  91.69,36.51 0 bottom
TP11  [PAD.03X.05]  91.69,34.42 0 bottom
TP12  [PAD.03X.05]  92.96,33.66 0 bottom
TP13  [PAD.03X.05]  92.96,35.62 0 bottom
TP14  [PAD.03X.05]  92.96,37.66 0 bottom
TP15  [PAD.03X.05]  169.16,28.45 0 bottom
TP16  [PAD.03X.05]  151.89,38.48 0 bottom
TP17  [PAD.03X.05]  151.89,36.51 0 bottom
TP18  [PAD.03X.05]  151.89,34.42 0 bottom
TP19  [PAD.03X.05]  153.16,33.66 0 bottom
TP20  [PAD.03X.05]  153.16,35.62 0 bottom
TP21  [PAD.03X.05]  153.16,37.66 0 bottom
TP22  [PAD.03X.05]  229.36,28.45 0 bottom
TP23  [PAD.03X.05]  212.09,38.48 0 bottom
TP24  [PAD.03X.05]  212.09,36.51 0 bottom
TP25  [PAD.03X.05]  212.09,34.42 0 bottom
TP26  [PAD.03X.05]  213.36,33.66 0 bottom
TP27  [PAD.03X.05]  213.36,35.62 0 bottom
TP28  [PAD.03X.05]  213.36,37.66 0 bottom
TP29  [PAD.03X.05]  48.77,82.3 0 bottom
TP30  [PAD.03X.05]  31.5,92.33 0 bottom
TP31  [PAD.03X.05]  31.5,90.36 0 bottom
TP32  [PAD.03X.05]  31.5,88.27 0 bottom
TP33  [PAD.03X.05]  32.77,87.5 0 bottom
TP34  [PAD.03X.05]  32.77,89.47 0 bottom
TP35  [PAD.03X.05]  32.77,91.5 0 bottom
TP36  [PAD.03X.05]  108.97,82.3 0 bottom
TP37  [PAD.03X.05]  91.69,92.33 0 bottom
TP38  [PAD.03X.05]  91.69,90.36 0 bottom
TP39  [PAD.03X.05]  91.69,88.27 0 bottom
TP40  [PAD.03X.05]  92.96,87.5 0 bottom
TP41  [PAD.03X.05]  92.96,89.47 0 bottom
TP42  [PAD.03X.05]  92.96,91.5 0 bottom
TP43  [PAD.03X.05]  169.16,82.3 0 bottom
TP44  [PAD.03X.05]  151.89,92.33 0 bottom
TP45  [PAD.03X.05]  151.89,90.36 0 bottom
TP46  [PAD.03X.05]  151.89,88.27 0 bottom
TP47  [PAD.03X.05]  153.16,87.5 0 bottom
TP48  [PAD.03X.05]  153.16,89.47 0 bottom
TP49  [PAD.03X.05]  153.16,91.5 0 bottom
TP50  [PAD.03X.05]  229.36,82.3 0 bottom
TP51  [PAD.03X.05]  212.09,92.33 0 bottom
TP52  [PAD.03X.05]  212.09,90.36 0 bottom
TP53  [PAD.03X.05]  212.09,88.27 0 bottom
TP54  [PAD.03X.05]  213.36,87.5 0 bottom
TP55  [PAD.03X.05]  213.36,89.47 0 bottom
TP56  [PAD.03X.05]  213.36,91.5 0 bottom
U1  AP2112K-3.3V  [SOT23-5]  34.8,18.29 0 top
U2  ESP8266  [QFN32]  44.96,34.8 180 top
U3  AT25SF041-SOIC8  [SO08]  32.26,36.07 270 top
U4  ESP8266  [QFN32]  105.16,34.8 180 top
U5  AT25SF041-SOIC8  [SO08]  92.46,36.07 270 top
U6  AP2112K-3.3V  [SOT23-5]  95,18.29 0 top
U7  ESP8266  [QFN32]  165.35,34.8 180 top
U8  AT25SF041-SOIC8  [SO08]  152.65,36.07 270 top
U9  AP2112K-3.3V  [SOT23-5]  155.19,18.29 0 top
U10  ESP8266  [QFN32]  225.55,34.8 180 top
U11  AT25SF041-SOIC8  [SO08]  212.85,36.07 270 top
U12  AP2112K-3.3V  [SOT23-5]  215.39,18.29 0 top
U13  ESP8266  [QFN32]  44.96,88.65 180 top
U14  AT25SF041-SOIC8  [SO08]  32.26,89.92 270 top
U15  AP2112K-3.3V  [SOT23-5]  34.8,72.14 0 top
U16  ESP8266  [QFN32]  105.16,88.65 180 top
U17  AT25SF041-SOIC8  [SO08]  92.46,89.92 270 top
U18  AP2112K-3.3V  [SOT23-5]  95,72.14 0 top
U19  ESP8266  [QFN32]  165.35,88.65 180 top
U20  AT25SF041-SOIC8  [SO08]  152.65,89.92 270 top
U21  AP2112K-3.3V  [SOT23-5]  155.19,72.14 0 top
U22  ESP8266  [QFN32]  225.55,88.65 180 top
U23  AT25SF041-SOIC8  [SO08]  212.85,89.92 270 top
U24  AP2112K-3.3V  [SOT23-5]  215.39,72.14 0 top
Y1  26MHz  [CRYSTAL-SMD-3.2X2.5]  42.42,28.45 0 top
Y2  26MHz  [CRYSTAL-SMD-3.2X2.5]  102.62,28.45 0 top
Y3  26MHz  [CRYSTAL-SMD-3.2X2.5]  162.81,28.45 0 top
Y4  26MHz  [CRYSTAL-SMD-3.2X2.5]  223.01,28.45 0 top
Y5  26MHz  [CRYSTAL-SMD-3.2X2.5]  42.42,82.3 0 top
Y6  26MHz  [CRYSTAL-SMD-3.2X2.5]  102.62,82.3 0 top
Y7  26MHz  [CRYSTAL-SMD-3.2X2.5]  162.81,82.3 0 top
Y8  26MHz  [CRYSTAL-SMD-3.2X2.5]  223.01,82.3 0 top

## Library data of the parts
C1 C10 C19 C28 C37 C46 C55 C64 = SparkFun-Capacitors; PROD_ID: CAP-11015
C2 C14 C23 C32 C41 C50 C59 C68 = SparkFun-Capacitors; PROD_ID: CAP-11625
C3 C9 C11 C18 C20 C27 C29 C36 C38 C45 C47 C54 C56 C63 C65 C72 = SparkFun-Capacitors; PROD_ID: CAP-00810
C4 C5 C16 C17 C25 C26 C34 C35 C43 C44 C52 C53 C61 C62 C70 C71 = SparkFun-Capacitors; PROD_ID: CAP-11812
C6 C15 C24 C33 C42 C51 C60 C69 = SparkFun-Capacitors; PROD_ID: CAP-07888
C7 C13 C22 C31 C40 C49 C58 C67 = SparkFun-Capacitors; PROD_ID: CAP-00868
C8 C12 C21 C30 C39 C48 C57 C66 = SparkFun-Capacitors; PROD_ID: CAP-12456
D1 D5 D8 D11 D14 D17 D20 D23 = SparkFun-LED; PROD_ID: DIO-00819
D2 D6 D9 D12 D15 D18 D21 D24 = SparkFun-LED; PROD_ID: DIO-08575
D3 D4 D7 D10 D13 D16 D19 D22 = SparkFun-DiscreteSemi; PROD_ID: DIO-09646
E1-E8 = esp8266-development-board
E$1 = SparkFun-Retired
E$4 E$5 FID1-FID16 LOGO1-LOGO24 = SparkFun-Aesthetics
JP1 JP2 JP6 JP8 JP10 JP12 JP14 JP16 JP18 JP20 JP22 JP24 JP26 JP28 JP30 JP32 = SparkFun-Connectors
JP3 JP5 JP9 JP13 JP17 JP21 JP25 JP29 = SparkFun-Boards
JP4 JP7 JP11 JP15 JP19 JP23 JP27 JP31 = SparkFun-Connectors; PROD_ID: CONN-09193
L1-L16 R11 R19 R33 R47 R61 R75 R89 R103 SJ1-SJ32 TP1-TP56 = SparkFun-Passives
Q1-Q16 = SparkFun-DiscreteSemi; PROD_ID: TRANS-00830
R1 R20 R34 R48 R62 R76 R90 R104 = SparkFun-Resistors; PROD_ID: RES-10327
R2 R4 R6 R21-R23 R35-R37 R49-R51 R63-R65 R77-R79 R91-R93 R105-R107 = SparkFun-Resistors; PROD_ID: RES-08220
R3 R5 R7-R9 R12 R13 R15 R16 R24-R30 R38-R44 R52-R58 R66-R72 R80-R86 R94-R100 R108-R112 = SparkFun-Resistors; PROD_ID: RES-00824
R10 R18 R32 R46 R60 R74 R88 R102 = SparkFun-Resistors; PROD_ID: RES-08609
R14 R17 R31 R45 R59 R73 R87 R101 = SparkFun-Resistors; PROD_ID: RES-07856
S1 S4 S6 S8 S10 S12 S14 S16 = SparkFun-Electromechanical; PROD_ID: SWCH-08179
S2 S3 S5 S7 S9 S11 S13 S15 = SparkFun-Electromechanical; PROD_ID: SWCH-08247
STANDOFF1-STANDOFF32 = SparkFun-Electromechanical
U1 U6 U9 U12 U15 U18 U21 U24 = SparkFun-PowerIC; PROD_ID: VREG-12457
U2 U4 U7 U10 U13 U16 U19 U22 = esp8266-development-board; PROD_ID: IC-12452
U3 U5 U8 U11 U14 U17 U20 U23 = esp8266-development-board; PROD_ID: IC-12455
Y1-Y8 = things; PROD_ID: XTAL-12454

## Nets
5V: C2.1 JP3.5V R9.2 R13.2 SJ3.1 U1.1 U1.3
5V1: C14.1 JP5.5V R27.2 R28.2 SJ5.1 U6.1 U6.3
5V2: C23.1 JP9.5V R41.2 R42.2 SJ9.1 U9.1 U9.3
5V3: C32.1 JP13.5V R55.2 R56.2 SJ13.1 U12.1 U12.3
5V4: C41.1 JP17.5V R69.2 R70.2 SJ17.1 U15.1 U15.3
5V5: C50.1 JP21.5V R83.2 R84.2 SJ21.1 U18.1 U18.3
5V6: C59.1 JP25.5V R97.2 R98.2 SJ25.1 U21.1 U21.3
5V7: C68.1 JP29.5V R111.2 R112.2 SJ29.1 U24.1 U24.3
ADC: JP1.10 U2.6
ADC1: JP8.10 U4.6
ADC2: JP12.10 U7.6
ADC3: JP16.10 U10.6
ADC4: JP20.10 U13.6
ADC5: JP24.10 U16.6
ADC6: JP28.10 U19.6
ADC7: JP32.10 U22.6
ANT: JP4.P$3 R11.1
ANT1: JP7.P$3 R19.1
ANT2: JP11.P$3 R33.1
ANT3: JP15.P$3 R47.1
ANT4: JP19.P$3 R61.1
ANT5: JP23.P$3 R75.1
ANT6: JP27.P$3 R89.1
ANT7: JP31.P$3 R103.1
ARD_HW_RX: JP3.RX S1.4
ARD_HW_RX1: JP5.RX S4.4
ARD_HW_RX2: JP9.RX S6.4
ARD_HW_RX3: JP13.RX S8.4
ARD_HW_RX4: JP17.RX S10.4
ARD_HW_RX5: JP21.RX S12.4
ARD_HW_RX6: JP25.RX S14.4
ARD_HW_RX7: JP29.RX S16.4
ARD_HW_TX: JP3.TX S1.1
ARD_HW_TX1: JP5.TX S4.1
ARD_HW_TX2: JP9.TX S6.1
ARD_HW_TX3: JP13.TX S8.1
ARD_HW_TX4: JP17.TX S10.1
ARD_HW_TX5: JP21.TX S12.1
ARD_HW_TX6: JP25.TX S14.1
ARD_HW_TX7: JP29.TX S16.1
ARD_RST: JP3.RES S2.3 SJ4.1
ARD_RST1: JP5.RES S3.3 SJ8.1
ARD_RST2: JP9.RES S5.3 SJ12.1
ARD_RST3: JP13.RES S7.3 SJ16.1
ARD_RST4: JP17.RES S9.3 SJ20.1
ARD_RST5: JP21.RES S11.3 SJ24.1
ARD_RST6: JP25.RES S13.3 SJ28.1
ARD_RST7: JP29.RES S15.3 SJ32.1
ARD_SW_RX: JP3.D8 S1.6
ARD_SW_RX1: JP5.D8 S4.6
ARD_SW_RX2: JP9.D8 S6.6
ARD_SW_RX3: JP13.D8 S8.6
ARD_SW_RX4: JP17.D8 S10.6
ARD_SW_RX5: JP21.D8 S12.6
ARD_SW_RX6: JP25.D8 S14.6
ARD_SW_RX7: JP29.D8 S16.6
ARD_SW_TX: JP3.D9 S1.3
ARD_SW_TX1: JP5.D9 S4.3
ARD_SW_TX2: JP9.D9 S6.3
ARD_SW_TX3: JP13.D9 S8.3
ARD_SW_TX4: JP17.D9 S10.3
ARD_SW_TX5: JP21.D9 S12.3
ARD_SW_TX6: JP25.D9 S14.3
ARD_SW_TX7: JP29.D9 S16.3
CHIP_EN: R3.1 U2.7
CHIP_EN1: R16.1 U4.7
CHIP_EN2: R30.1 U7.7
CHIP_EN3: R44.1 U10.7
CHIP_EN4: R58.1 U13.7
CHIP_EN5: R72.1 U16.7
CHIP_EN6: R86.1 U19.7
CHIP_EN7: R100.1 U22.7
DTR: C7.2 JP2.DTR SJ1.1 SJ2.1
DTR1: C13.2 JP6.DTR SJ6.1 SJ7.1
DTR2: C22.2 JP10.DTR SJ10.1 SJ11.1
DTR3: C31.2 JP14.DTR SJ14.1 SJ15.1
DTR4: C40.2 JP18.DTR SJ18.1 SJ19.1
DTR5: C49.2 JP22.DTR SJ22.1 SJ23.1
DTR6: C58.2 JP26.DTR SJ26.1 SJ27.1
DTR7: C67.2 JP30.DTR SJ30.1 SJ31.1
GND: C1.2 C2.2 C3.2 C4.1 C5.1 C6.2 C9.2 E1.GND E1.GND2 JP2.GND JP3.GND@0 JP3.GND@1 JP3.GND@2 JP4.P$1 JP4.P$2 L1.2 L2.2 R1.1 R2.2 R8.1 S2.1 U1.2 U2.EP U3.4 Y1.2 Y1.4
GND1: C10.2 C11.2 C14.2 C15.2 C16.1 C17.1 C18.2 E2.GND E2.GND2 JP5.GND@0 JP5.GND@1 JP5.GND@2 JP6.GND JP7.P$1 JP7.P$2 L3.2 L4.2 R20.1 R23.2 R24.1 S3.1 U4.EP U5.4 U6.2 Y2.2 Y2.4
GND2: C19.2 C20.2 C23.2 C24.2 C25.1 C26.1 C27.2 E3.GND E3.GND2 JP9.GND@0 JP9.GND@1 JP9.GND@2 JP10.GND JP11.P$1 JP11.P$2 L5.2 L6.2 R34.1 R37.2 R38.1 S5.1 U7.EP U8.4 U9.2 Y3.2 Y3.4
GND3: C28.2 C29.2 C32.2 C33.2 C34.1 C35.1 C36.2 E4.GND E4.GND2 JP13.GND@0 JP13.GND@1 JP13.GND@2 JP14.GND JP15.P$1 JP15.P$2 L7.2 L8.2 R48.1 R51.2 R52.1 S7.1 U10.EP U11.4 U12.2 Y4.2 Y4.4
GND4: C37.2 C38.2 C41.2 C42.2 C43.1 C44.1 C45.2 E5.GND E5.GND2 JP17.GND@0 JP17.GND@1 JP17.GND@2 JP18.GND JP19.P$1 JP19.P$2 L9.2 L10.2 R62.1 R65.2 R66.1 S9.1 U13.EP U14.4 U15.2 Y5.2 Y5.4
GND5: C46.2 C47.2 C50.2 C51.2 C52.1 C53.1 C54.2 E6.GND E6.GND2 JP21.GND@0 JP21.GND@1 JP21.GND@2 JP22.GND JP23.P$1 JP23.P$2 L11.2 L12.2 R76.1 R79.2 R80.1 S11.1 U16.EP U17.4 U18.2 Y6.2 Y6.4
GND6: C55.2 C56.2 C59.2 C60.2 C61.1 C62.1 C63.2 E7.GND E7.GND2 JP25.GND@0 JP25.GND@1 JP25.GND@2 JP26.GND JP27.P$1 JP27.P$2 L13.2 L14.2 R90.1 R93.2 R94.1 S13.1 U19.EP U20.4 U21.2 Y7.2 Y7.4
GND7: C64.2 C65.2 C68.2 C69.2 C70.1 C71.1 C72.2 E8.GND E8.GND2 JP29.GND@0 JP29.GND@1 JP29.GND@2 JP30.GND JP31.P$1 JP31.P$2 L15.2 L16.2 R104.1 R107.2 R108.1 S15.1 U22.EP U23.4 U24.2 Y8.2 Y8.4
GPIO0: D3.A JP1.11 R14.1 U2.15
GPIO1: JP8.8 U4.9
GPIO2: JP1.5 U2.14
GPIO3: D4.A JP8.11 R17.1 U4.15
GPIO4: JP1.4 SJ4.2 U2.16
GPIO5: JP1.1 R6.1 U2.24
GPIO6: JP8.1 R21.1 U4.24
GPIO7: JP8.4 SJ8.2 U4.16
GPIO8: JP8.3 R24.2 U4.13
GPIO9: JP8.6 U4.12
GPIO10: JP8.7 U4.10
GPIO11: JP8.5 U4.14
GPIO12: JP1.7 U2.10
GPIO13: JP1.6 U2.12
GPIO14: JP1.8 U2.9
GPIO15: JP1.3 R8.2 U2.13
GPIO16: JP12.8 U7.9
GPIO17: D7.A JP12.11 R31.1 U7.15
GPIO18: JP12.1 R35.1 U7.24
GPIO19: JP12.4 SJ12.2 U7.16
GPIO20: JP12.3 R38.2 U7.13
GPIO21: JP12.6 U7.12
GPIO22: JP12.7 U7.10
GPIO23: JP12.5 U7.14
GPIO24: JP16.8 U10.9
GPIO25: D10.A JP16.11 R45.1 U10.15
GPIO26: JP16.1 R49.1 U10.24
GPIO27: JP16.4 SJ16.2 U10.16
GPIO28: JP16.3 R52.2 U10.13
GPIO29: JP16.6 U10.12
GPIO30: JP16.7 U10.10
GPIO31: JP16.5 U10.14
GPIO32: JP20.8 U13.9
GPIO33: D13.A JP20.11 R59.1 U13.15
GPIO34: JP20.1 R63.1 U13.24
GPIO35: JP20.4 SJ20.2 U13.16
GPIO36: JP20.3 R66.2 U13.13
GPIO37: JP20.6 U13.12
GPIO38: JP20.7 U13.10
GPIO39: JP20.5 U13.14
GPIO40: JP24.8 U16.9
GPIO41: D16.A JP24.11 R73.1 U16.15
GPIO42: JP24.1 R77.1 U16.24
GPIO43: JP24.4 SJ24.2 U16.16
GPIO44: JP24.3 R80.2 U16.13
GPIO45: JP24.6 U16.12
GPIO46: JP24.7 U16.10
GPIO47: JP24.5 U16.14
GPIO48: JP28.8 U19.9
GPIO49: D19.A JP28.11 R87.1 U19.15
GPIO50: JP28.1 R91.1 U19.24
GPIO51: JP28.4 SJ28.2 U19.16
GPIO52: JP28.3 R94.2 U19.13
GPIO53: JP28.6 U19.12
GPIO54: JP28.7 U19.10
GPIO55: JP28.5 U19.14
GPIO56: JP32.8 U22.9
GPIO57: D22.A JP32.11 R101.1 U22.15
GPIO58: JP32.1 R105.1 U22.24
GPIO59: JP32.4 SJ32.2 U22.16
GPIO60: JP32.3 R108.2 U22.13
GPIO61: JP32.6 U22.12
GPIO62: JP32.7 U22.10
GPIO63: JP32.5 U22.14
LNA: C8.1 L1.1 U2.2
LNA1: C12.1 L3.1 U4.2
LNA2: C21.1 L5.1 U7.2
LNA3: C30.1 L7.1 U10.2
LNA4: C39.1 L9.1 U13.2
LNA5: C48.1 L11.1 U16.2
LNA6: C57.1 L13.1 U19.2
LNA7: C66.1 L15.1 U22.2
N$1: R1.2 U2.31
N$2: C5.2 U2.28 Y1.3
N$3: C4.2 U2.27 Y1.1
N$4: D1.C R2.1
N$5: C8.2 L2.1 R10.2 R11.2
N$6: R4.2 U2.21
N$7: JP2.VCC SJ3.2
N$8: R20.2 U4.31
N$9: D2.C R6.2
N$10: C17.2 U4.28 Y2.3
N$11: C16.2 U4.27 Y2.1
N$12: C12.2 L4.1 R18.2 R19.2
N$13: R22.2 U4.21
N$14: D5.C R23.1
N$15: JP6.VCC SJ5.2
N$16: D6.C R21.2
N$17: R34.2 U7.31
N$18: C26.2 U7.28 Y3.3
N$19: C25.2 U7.27 Y3.1
N$20: C21.2 L6.1 R32.2 R33.2
N$21: R36.2 U7.21
N$22: D8.C R37.1
N$23: JP10.VCC SJ9.2
N$24: D9.C R35.2
N$25: R48.2 U10.31
N$26: C35.2 U10.28 Y4.3
N$27: C34.2 U10.27 Y4.1
N$28: C30.2 L8.1 R46.2 R47.2
N$29: R50.2 U10.21
N$30: D11.C R51.1
N$31: JP14.VCC SJ13.2
N$32: D12.C R49.2
N$33: R62.2 U13.31
N$34: C44.2 U13.28 Y5.3
N$35: C43.2 U13.27 Y5.1
N$36: C39.2 L10.1 R60.2 R61.2
N$37: R64.2 U13.21
N$38: D14.C R65.1
N$39: JP18.VCC SJ17.2
N$40: D15.C R63.2
N$41: R76.2 U16.31
N$42: C53.2 U16.28 Y6.3
N$43: C52.2 U16.27 Y6.1
N$44: C48.2 L12.1 R74.2 R75.2
N$45: R78.2 U16.21
N$46: D17.C R79.1
N$47: JP22.VCC SJ21.2
N$48: D18.C R77.2
N$49: R90.2 U19.31
N$50: C62.2 U19.28 Y7.3
N$51: C61.2 U19.27 Y7.1
N$52: C57.2 L14.1 R88.2 R89.2
N$53: R92.2 U19.21
N$54: D20.C R93.1
N$55: JP26.VCC SJ25.2
N$56: D21.C R91.2
N$57: R104.2 U22.31
N$58: C71.2 U22.28 Y8.3
N$59: C70.2 U22.27 Y8.1
N$60: C66.2 L16.1 R102.2 R103.2
N$61: R106.2 U22.21
N$62: D23.C R107.1
N$63: JP30.VCC SJ29.2
N$64: D24.C R105.2
RESET: C7.1 JP1.2 R5.1 TP7.P$1 U2.32
RESET1: C13.1 JP8.2 R15.1 TP8.P$1 U4.32
RESET2: C22.1 JP12.2 R29.1 TP15.P$1 U7.32
RESET3: C31.1 JP16.2 R43.1 TP22.P$1 U10.32
RESET4: C40.1 JP20.2 R57.1 TP29.P$1 U13.32
RESET5: C49.1 JP24.2 R71.1 TP36.P$1 U16.32
RESET6: C58.1 JP28.2 R85.1 TP43.P$1 U19.32
RESET7: C67.1 JP32.2 R99.1 TP50.P$1 U22.32
RX_HIGH: JP2.TXO Q1.3 R9.1 S1.2
RX_HIGH1: JP6.TXO Q3.3 R27.1 S4.2
RX_HIGH2: JP10.TXO Q5.3 R41.1 S6.2
RX_HIGH3: JP14.TXO Q7.3 R55.1 S8.2
RX_HIGH4: JP18.TXO Q9.3 R69.1 S10.2
RX_HIGH5: JP22.TXO Q11.3 R83.1 S12.2
RX_HIGH6: JP26.TXO Q13.3 R97.1 S14.2
RX_HIGH7: JP30.TXO Q15.3 R111.1 S16.2
SD_!HD!: TP4.P$1 U2.18 U3.7
SD_!HD!1: TP14.P$1 U4.18 U5.7
SD_!HD!2: TP21.P$1 U7.18 U8.7
SD_!HD!3: TP28.P$1 U10.18 U11.7
SD_!HD!4: TP35.P$1 U13.18 U14.7
SD_!HD!5: TP42.P$1 U16.18 U17.7
SD_!HD!6: TP49.P$1 U19.18 U20.7
SD_!HD!7: TP56.P$1 U22.18 U23.7
SD_!WP!: TP1.P$1 U2.19 U3.3
SD_!WP!1: TP11.P$1 U4.19 U5.3
SD_!WP!2: TP18.P$1 U7.19 U8.3
SD_!WP!3: TP25.P$1 U10.19 U11.3
SD_!WP!4: TP32.P$1 U13.19 U14.3
SD_!WP!5: TP39.P$1 U16.19 U17.3
SD_!WP!6: TP46.P$1 U19.19 U20.3
SD_!WP!7: TP53.P$1 U22.19 U23.3
SD_CLK: R4.1 TP3.P$1 U3.6
SD_CLK1: R22.1 TP13.P$1 U5.6
SD_CLK2: R36.1 TP20.P$1 U8.6
SD_CLK3: R50.1 TP27.P$1 U11.6
SD_CLK4: R64.1 TP34.P$1 U14.6
SD_CLK5: R78.1 TP41.P$1 U17.6
SD_CLK6: R92.1 TP48.P$1 U20.6
SD_CLK7: R106.1 TP55.P$1 U23.6
SD_CS0: TP6.P$1 U2.20 U3.1
SD_CS1: TP9.P$1 U4.20 U5.1
SD_CS2: TP16.P$1 U7.20 U8.1
SD_CS3: TP23.P$1 U10.20 U11.1
SD_CS4: TP30.P$1 U13.20 U14.1
SD_CS5: TP37.P$1 U16.20 U17.1
SD_CS6: TP44.P$1 U19.20 U20.1
SD_CS7: TP51.P$1 U22.20 U23.1
SD_SI: TP2.P$1 U2.23 U3.5
SD_SI1: TP12.P$1 U4.23 U5.5
SD_SI2: TP19.P$1 U7.23 U8.5
SD_SI3: TP26.P$1 U10.23 U11.5
SD_SI4: TP33.P$1 U13.23 U14.5
SD_SI5: TP40.P$1 U16.23 U17.5
SD_SI6: TP47.P$1 U19.23 U20.5
SD_SI7: TP54.P$1 U22.23 U23.5
SD_SO: TP5.P$1 U2.22 U3.2
SD_SO1: TP10.P$1 U4.22 U5.2
SD_SO2: TP17.P$1 U7.22 U8.2
SD_SO3: TP24.P$1 U10.22 U11.2
SD_SO4: TP31.P$1 U13.22 U14.2
SD_SO5: TP38.P$1 U16.22 U17.2
SD_SO6: TP45.P$1 U19.22 U20.2
SD_SO7: TP52.P$1 U22.22 U23.2
SJ1: D4.C SJ6.2 SJ7.2
SJ2: D3.C SJ1.2 SJ2.2
SJ3: D7.C SJ10.2 SJ11.2
SJ4: D10.C SJ14.2 SJ15.2
SJ5: D13.C SJ18.2 SJ19.2
SJ6: D16.C SJ22.2 SJ23.2
SJ7: D19.C SJ26.2 SJ27.2
SJ8: D22.C SJ30.2 SJ31.2
TRACE_ANT: E1.ANT R10.1
TRACE_ANT1: E2.ANT R18.1
TRACE_ANT2: E3.ANT R32.1
TRACE_ANT3: E4.ANT R46.1
TRACE_ANT4: E5.ANT R60.1
TRACE_ANT5: E6.ANT R74.1
TRACE_ANT6: E7.ANT R88.1
TRACE_ANT7: E8.ANT R102.1
TX_HIGH: JP2.RXI Q2.3 R13.1 S1.5
TX_HIGH1: JP6.RXI Q4.3 R28.1 S4.5
TX_HIGH2: JP10.RXI Q6.3 R42.1 S6.5
TX_HIGH3: JP14.RXI Q8.3 R56.1 S8.5
TX_HIGH4: JP18.RXI Q10.3 R70.1 S10.5
TX_HIGH5: JP22.RXI Q12.3 R84.1 S12.5
TX_HIGH6: JP26.RXI Q14.3 R98.1 S14.5
TX_HIGH7: JP30.RXI Q16.3 R112.1 S16.5
U0RXI: Q1.2 R7.1 U2.25
U0RXI1: Q3.2 R26.1 U4.25
U0RXI2: Q5.2 R40.1 U7.25
U0RXI3: Q7.2 R54.1 U10.25
U0RXI4: Q9.2 R68.1 U13.25
U0RXI5: Q11.2 R82.1 U16.25
U0RXI6: Q13.2 R96.1 U19.25
U0RXI7: Q15.2 R110.1 U22.25
U0TXO: Q2.2 R12.1 U2.26
U0TXO1: Q4.2 R25.1 U4.26
U0TXO2: Q6.2 R39.1 U7.26
U0TXO3: Q8.2 R53.1 U10.26
U0TXO4: Q10.2 R67.1 U13.26
U0TXO5: Q12.2 R81.1 U16.26
U0TXO6: Q14.2 R95.1 U19.26
U0TXO7: Q16.2 R109.1 U22.26
VCC: C1.1 C3.1 C6.1 C9.1 D1.A D2.A Q1.1 Q2.1 R3.2 R5.2 R7.2 R12.2 R14.2 U1.5 U2.1 U2.3 U2.4 U2.11 U2.17 U2.29 U2.30 U3.8
VCC1: C10.1 C11.1 C15.1 C18.1 D5.A D6.A Q3.1 Q4.1 R15.2 R16.2 R17.2 R25.2 R26.2 U4.1 U4.3 U4.4 U4.11 U4.17 U4.29 U4.30 U5.8 U6.5
VCC2: C19.1 C20.1 C24.1 C27.1 D8.A D9.A Q5.1 Q6.1 R29.2 R30.2 R31.2 R39.2 R40.2 U7.1 U7.3 U7.4 U7.11 U7.17 U7.29 U7.30 U8.8 U9.5
VCC3: C28.1 C29.1 C33.1 C36.1 D11.A D12.A Q7.1 Q8.1 R43.2 R44.2 R45.2 R53.2 R54.2 U10.1 U10.3 U10.4 U10.11 U10.17 U10.29 U10.30 U11.8 U12.5
VCC4: C37.1 C38.1 C42.1 C45.1 D14.A D15.A Q9.1 Q10.1 R57.2 R58.2 R59.2 R67.2 R68.2 U13.1 U13.3 U13.4 U13.11 U13.17 U13.29 U13.30 U14.8 U15.5
VCC5: C46.1 C47.1 C51.1 C54.1 D17.A D18.A Q11.1 Q12.1 R71.2 R72.2 R73.2 R81.2 R82.2 U16.1 U16.3 U16.4 U16.11 U16.17 U16.29 U16.30 U17.8 U18.5
VCC6: C55.1 C56.1 C60.1 C63.1 D20.A D21.A Q13.1 Q14.1 R85.2 R86.2 R87.2 R95.2 R96.2 U19.1 U19.3 U19.4 U19.11 U19.17 U19.29 U19.30 U20.8 U21.5
VCC7: C64.1 C65.1 C69.1 C72.1 D23.A D24.A Q15.1 Q16.1 R99.2 R100.2 R101.2 R109.2 R110.2 U22.1 U22.3 U22.4 U22.11 U22.17 U22.29 U22.30 U23.8 U24.5
XPD: JP1.9 U2.8
XPD1: JP8.9 U4.8
XPD2: JP12.9 U7.8
XPD3: JP16.9 U10.8
XPD4: JP20.9 U13.8
XPD5: JP24.9 U16.8
XPD6: JP28.9 U19.8
XPD7: JP32.9 U22.8

## Tracks (layer width: path | path; a pad name or v marks a point on that pad's centre or on a via)
5V  (via drill 0.38)
  Top 0.203: 53.21,51.31 R9.2 | v53.21,50.04 53.21,51.31 | 53.21,51.31 R13.2
  Top 0.406: JP3.5V 36.07,11.94 37.34,13.21 37.34,15.49 | U1.1 33.85,15.94 34.29,15.49 35.75,15.49 | 37.34,15.49 C2.1 | 35.75,15.49 37.34,15.49 | U1.3 35.75,15.49
  Bottom 0.203: 36.07,10.41 JP3.5V | 27.05,44.83 29.72,47.5 50.67,47.5 v53.21,50.04
  Bottom 0.406: 33.53,11.94 JP3.5V 27.05,18.41 27.05,44.83 24.38,47.5 SJ3.1
5V1  (via drill 0.38)
  Top 0.203: 113.41,51.31 R27.2 | v113.41,50.04 113.41,51.31 | 113.41,51.31 R28.2
  Top 0.406: JP5.5V 96.27,11.94 97.54,13.21 97.54,15.49 | U6.1 94.05,15.94 94.49,15.49 95.95,15.49 | 97.54,15.49 C14.1 | 95.95,15.49 97.54,15.49 | U6.3 95.95,15.49
  Bottom 0.203: 96.27,10.41 JP5.5V | 87.25,44.83 89.92,47.5 110.87,47.5 v113.41,50.04
  Bottom 0.406: 93.73,11.94 JP5.5V 87.25,18.41 87.25,44.83 84.58,47.5 SJ5.1
5V2  (via drill 0.38)
  Top 0.203: 173.61,51.31 R41.2 | v173.61,50.04 173.61,51.31 | 173.61,51.31 R42.2
  Top 0.406: JP9.5V 156.46,11.94 157.73,13.21 157.73,15.49 | U9.1 154.24,15.94 154.69,15.49 156.14,15.49 | 157.73,15.49 C23.1 | 156.14,15.49 157.73,15.49 | U9.3 156.14,15.49
  Bottom 0.203: 156.46,10.41 JP9.5V | 147.45,44.83 150.11,47.5 171.07,47.5 v173.61,50.04
  Bottom 0.406: 153.92,11.94 JP9.5V 147.45,18.41 147.45,44.83 144.78,47.5 SJ9.1
5V3  (via drill 0.38)
  Top 0.203: 233.81,51.31 R55.2 | v233.81,50.04 233.81,51.31 | 233.81,51.31 R56.2
  Top 0.406: JP13.5V 216.66,11.94 217.93,13.21 217.93,15.49 | U12.1 214.44,15.94 214.88,15.49 216.34,15.49 | 217.93,15.49 C32.1 | 216.34,15.49 217.93,15.49 | U12.3 216.34,15.49
  Bottom 0.203: 216.66,10.41 JP13.5V | 207.65,44.83 210.31,47.5 231.27,47.5 v233.81,50.04
  Bottom 0.406: 214.12,11.94 JP13.5V 207.65,18.41 207.65,44.83 204.98,47.5 SJ13.1
5V4  (via drill 0.38)
  Top 0.203: 53.21,105.16 R69.2 | v53.21,103.89 53.21,105.16 | 53.21,105.16 R70.2
  Top 0.406: JP17.5V 36.07,65.79 37.34,67.06 37.34,69.34 | U15.1 33.85,69.78 34.29,69.34 35.75,69.34 | 37.34,69.34 C41.1 | 35.75,69.34 37.34,69.34 | U15.3 35.75,69.34
  Bottom 0.203: 36.07,64.26 JP17.5V | 27.05,98.68 29.72,101.35 50.67,101.35 v53.21,103.89
  Bottom 0.406: 33.53,65.79 JP17.5V 27.05,72.26 27.05,98.68 24.38,101.35 SJ17.1
5V5  (via drill 0.38)
  Top 0.203: 113.41,105.16 R83.2 | v113.41,103.89 113.41,105.16 | 113.41,105.16 R84.2
  Top 0.406: JP21.5V 96.27,65.79 97.54,67.06 97.54,69.34 | U18.1 94.05,69.78 94.49,69.34 95.95,69.34 | 97.54,69.34 C50.1 | 95.95,69.34 97.54,69.34 | U18.3 95.95,69.34
  Bottom 0.203: 96.27,64.26 JP21.5V | 87.25,98.68 89.92,101.35 110.87,101.35 v113.41,103.89
  Bottom 0.406: 93.73,65.79 JP21.5V 87.25,72.26 87.25,98.68 84.58,101.35 SJ21.1
5V6  (via drill 0.38)
  Top 0.203: 173.61,105.16 R97.2 | v173.61,103.89 173.61,105.16 | 173.61,105.16 R98.2
  Top 0.406: JP25.5V 156.46,65.79 157.73,67.06 157.73,69.34 | U21.1 154.24,69.78 154.69,69.34 156.14,69.34 | 157.73,69.34 C59.1 | 156.14,69.34 157.73,69.34 | U21.3 156.14,69.34
  Bottom 0.203: 156.46,64.26 JP25.5V | 147.45,98.68 150.11,101.35 171.07,101.35 v173.61,103.89
  Bottom 0.406: 153.92,65.79 JP25.5V 147.45,72.26 147.45,98.68 144.78,101.35 SJ25.1
5V7  (via drill 0.38)
  Top 0.203: 233.81,105.16 R111.2 | v233.81,103.89 233.81,105.16 | 233.81,105.16 R112.2
  Top 0.406: JP29.5V 216.66,65.79 217.93,67.06 217.93,69.34 | U24.1 214.44,69.78 214.88,69.34 216.34,69.34 | 217.93,69.34 C68.1 | 216.34,69.34 217.93,69.34 | U24.3 216.34,69.34
  Bottom 0.203: 216.66,64.26 JP29.5V | 207.65,98.68 210.31,101.35 231.27,101.35 v233.81,103.89
  Bottom 0.406: 214.12,65.79 JP29.5V 207.65,72.26 207.65,98.68 204.98,101.35 SJ29.1
ADC
  Top 0.203: U2.6 48.25,35.55 49.15,36.45 49.15,39.75 43.31,45.59 20.19,45.59 17.14,42.55 17.14,40.01 9.4,32.26 JP1.10
ADC1
  Top 0.203: U4.6 108.45,35.55 109.35,36.45 109.35,39.75 103.5,45.59 80.39,45.59 77.34,42.55 77.34,40.01 69.6,32.26 JP8.10
ADC2
  Top 0.203: U7.6 168.64,35.55 169.54,36.45 169.54,39.75 163.7,45.59 140.59,45.59 137.54,42.55 137.54,40.01 129.79,32.26 JP12.10
ADC3
  Top 0.203: U10.6 228.84,35.55 229.74,36.45 229.74,39.75 223.9,45.59 200.79,45.59 197.74,42.55 197.74,40.01 189.99,32.26 JP16.10
ADC4
  Top 0.203: U13.6 48.25,89.4 49.15,90.3 49.15,93.6 43.31,99.44 20.19,99.44 17.14,96.39 17.14,93.85 9.4,86.11 JP20.10
ADC5
  Top 0.203: U16.6 108.45,89.4 109.35,90.3 109.35,93.6 103.5,99.44 80.39,99.44 77.34,96.39 77.34,93.85 69.6,86.11 JP24.10
ADC6
  Top 0.203: U19.6 168.64,89.4 169.54,90.3 169.54,93.6 163.7,99.44 140.59,99.44 137.54,96.39 137.54,93.85 129.79,86.11 JP28.10
ADC7
  Top 0.203: U22.6 228.84,89.4 229.74,90.3 229.74,93.6 223.9,99.44 200.79,99.44 197.74,96.39 197.74,93.85 189.99,86.11 JP32.10
ANT
  Top 1.016: R11.1 JP4.P$3
ANT1
  Top 1.016: R19.1 JP7.P$3
ANT2
  Top 1.016: R33.1 JP11.P$3
ANT3
  Top 1.016: R47.1 JP15.P$3
ANT4
  Top 1.016: R61.1 JP19.P$3
ANT5
  Top 1.016: R75.1 JP23.P$3
ANT6
  Top 1.016: R89.1 JP27.P$3
ANT7
  Top 1.016: R103.1 JP31.P$3
ARD_HW_RX
  Top 0.203: JP3.RX 61.47,56.39 60.2,55.12 48.77,55.12 47.46,53.81 S1.4
ARD_HW_RX1
  Top 0.203: JP5.RX 121.67,56.39 120.4,55.12 108.97,55.12 107.66,53.81 S4.4
ARD_HW_RX2
  Top 0.203: JP9.RX 181.86,56.39 180.59,55.12 169.16,55.12 167.85,53.81 S6.4
ARD_HW_RX3
  Top 0.203: JP13.RX 242.06,56.39 240.79,55.12 229.36,55.12 228.05,53.81 S8.4
ARD_HW_RX4
  Top 0.203: JP17.RX 61.47,110.24 60.2,108.97 48.77,108.97 47.46,107.66 S10.4
ARD_HW_RX5
  Top 0.203: JP21.RX 121.67,110.24 120.4,108.97 108.97,108.97 107.66,107.66 S12.4
ARD_HW_RX6
  Top 0.203: JP25.RX 181.86,110.24 180.59,108.97 169.16,108.97 167.85,107.66 S14.4
ARD_HW_RX7
  Top 0.203: JP29.RX 242.06,110.24 240.79,108.97 229.36,108.97 228.05,107.66 S16.4
ARD_HW_TX  (via drill 0.38)
  Top 0.203: v57.66,53.85 50.04,53.85 48.77,52.58 48.77,50.04 47.46,48.73 S1.1
  Bottom 0.203: JP3.TX 58.93,55.12 v57.66,53.85
ARD_HW_TX1  (via drill 0.38)
  Top 0.203: v117.86,53.85 110.24,53.85 108.97,52.58 108.97,50.04 107.66,48.73 S4.1
  Bottom 0.203: JP5.TX 119.13,55.12 v117.86,53.85
ARD_HW_TX2  (via drill 0.38)
  Top 0.203: v178.05,53.85 170.43,53.85 169.16,52.58 169.16,50.04 167.85,48.73 S6.1
  Bottom 0.203: JP9.TX 179.32,55.12 v178.05,53.85
ARD_HW_TX3  (via drill 0.38)
  Top 0.203: v238.25,53.85 230.63,53.85 229.36,52.58 229.36,50.04 228.05,48.73 S8.1
  Bottom 0.203: JP13.TX 239.52,55.12 v238.25,53.85
ARD_HW_TX4  (via drill 0.38)
  Top 0.203: v57.66,107.7 50.04,107.7 48.77,106.43 48.77,103.89 47.46,102.58 S10.1
  Bottom 0.203: JP17.TX 58.93,108.97 v57.66,107.7
ARD_HW_TX5  (via drill 0.38)
  Top 0.203: v117.86,107.7 110.24,107.7 108.97,106.43 108.97,103.89 107.66,102.58 S12.1
  Bottom 0.203: JP21.TX 119.13,108.97 v117.86,107.7
ARD_HW_TX6  (via drill 0.38)
  Top 0.203: v178.05,107.7 170.43,107.7 169.16,106.43 169.16,103.89 167.85,102.58 S14.1
  Bottom 0.203: JP25.TX 179.32,108.97 v178.05,107.7
ARD_HW_TX7  (via drill 0.38)
  Top 0.203: v238.25,107.7 230.63,107.7 229.36,106.43 229.36,103.89 228.05,102.58 S16.1
  Bottom 0.203: JP29.TX 239.52,108.97 v238.25,107.7
ARD_RST  (via drill 0.38)
  Top 0.203: S2.3 22.48,9.14 v24,10.67 29.72,10.67 JP3.RES
  Bottom 0.203: v24,10.67 24,14.48 21.46,17.02 SJ4.1
ARD_RST1  (via drill 0.38)
  Top 0.203: S3.3 82.68,9.14 v84.2,10.67 89.92,10.67 JP5.RES
  Bottom 0.203: v84.2,10.67 84.2,14.48 81.66,17.02 SJ8.1
ARD_RST2  (via drill 0.38)
  Top 0.203: S5.3 142.88,9.14 v144.4,10.67 150.11,10.67 JP9.RES
  Bottom 0.203: v144.4,10.67 144.4,14.48 141.86,17.02 SJ12.1
ARD_RST3  (via drill 0.38)
  Top 0.203: S7.3 203.07,9.14 v204.6,10.67 210.31,10.67 JP13.RES
  Bottom 0.203: v204.6,10.67 204.6,14.48 202.06,17.02 SJ16.1
ARD_RST4  (via drill 0.38)
  Top 0.203: S9.3 22.48,62.99 v24,64.52 29.72,64.52 JP17.RES
  Bottom 0.203: v24,64.52 24,68.33 21.46,70.87 SJ20.1
ARD_RST5  (via drill 0.38)
  Top 0.203: S11.3 82.68,62.99 v84.2,64.52 89.92,64.52 JP21.RES
  Bottom 0.203: v84.2,64.52 84.2,68.33 81.66,70.87 SJ24.1
ARD_RST6  (via drill 0.38)
  Top 0.203: S13.3 142.88,62.99 v144.4,64.52 150.11,64.52 JP25.RES
  Bottom 0.203: v144.4,64.52 144.4,68.33 141.86,70.87 SJ28.1
ARD_RST7  (via drill 0.38)
  Top 0.203: S15.3 203.07,62.99 v204.6,64.52 210.31,64.52 JP29.RES
  Bottom 0.203: v204.6,64.52 204.6,68.33 202.06,70.87 SJ32.1
ARD_SW_RX
  Top 0.203: S1.6 40.86,52.86 39.88,53.85 JP3.D8
ARD_SW_RX1
  Top 0.203: S4.6 101.06,52.86 100.08,53.85 JP5.D8
ARD_SW_RX2
  Top 0.203: S6.6 161.26,52.86 160.27,53.85 JP9.D8
ARD_SW_RX3
  Top 0.203: S8.6 221.46,52.86 220.47,53.85 JP13.D8
ARD_SW_RX4
  Top 0.203: S10.6 40.86,106.71 39.88,107.7 JP17.D8
ARD_SW_RX5
  Top 0.203: S12.6 101.06,106.71 100.08,107.7 JP21.D8
ARD_SW_RX6
  Top 0.203: S14.6 161.26,106.71 160.27,107.7 JP25.D8
ARD_SW_RX7
  Top 0.203: S16.6 221.46,106.71 220.47,107.7 JP29.D8
ARD_SW_TX
  Top 0.203: S1.3 41.43,47.21 37.34,51.31 JP3.D9
ARD_SW_TX1
  Top 0.203: S4.3 101.63,47.21 97.54,51.31 JP5.D9
ARD_SW_TX2
  Top 0.203: S6.3 161.83,47.21 157.73,51.31 JP9.D9
ARD_SW_TX3
  Top 0.203: S8.3 222.03,47.21 217.93,51.31 JP13.D9
ARD_SW_TX4
  Top 0.203: S10.3 41.43,101.06 37.34,105.16 JP17.D9
ARD_SW_TX5
  Top 0.203: S12.3 101.63,101.06 97.54,105.16 JP21.D9
ARD_SW_TX6
  Top 0.203: S14.3 161.83,101.06 157.73,105.16 JP25.D9
ARD_SW_TX7
  Top 0.203: S16.3 222.03,101.06 217.93,105.16 JP29.D9
CHIP_EN  (via drill 0.38)
  Top 0.203: U2.7 48.11,36.05 48.64,36.58 48.64,37.59 v48.39,37.85 | v51.31,39.12 R3.1
  Bottom 0.203: v48.39,37.85 50.55,37.85 51.31,38.61 v51.31,39.12
CHIP_EN1  (via drill 0.38)
  Top 0.203: U4.7 108.31,36.05 108.84,36.58 108.84,37.59 v108.58,37.85 | v111.51,39.12 R16.1
  Bottom 0.203: v108.58,37.85 110.74,37.85 111.51,38.61 v111.51,39.12
CHIP_EN2  (via drill 0.38)